# EAGLE board pnp-test (EAGLE 7.4.0)

Size 76 x 76 mm. Coordinates in mm from the lower left corner, seen from the top.
Outline: 0,0 0,76 76,76 76,0 0,0
Copper layers (1*16): Top 0.035mm / dielectric 1.5mm / Bottom 0.035mm
Design rules "default": minimum track width 10mil, minimum drill 24mil, track to track 8mil, track to pad 8mil, pad to pad 8mil, via to via 8mil, smd to smd 8mil, copper to edge 40mil, drill to drill 8mil, minimum pad ring 10mil, minimum via ring 8mil, stop-mask expansion 4mil, vias tented up to drill 0mil, thermal gap 10mil

## Footprints (pad centres in the part's own frame; a part is rotated, then mirrored left to right if it is on the bottom)
FIDUCIAL-1X2 = smd 1 x 1: 1 0,0
R0805 = smd 1.3 x 1.5: 1 -0.95,0; 2 0.95,0
R0201 = smd 0.28 x 0.43: 1 -0.255,0; 2 0.255,0
R0402 = smd 0.7 x 0.9: 1 -0.65,0; 2 0.65,0
R0603 = smd 1 x 1.1: 1 -0.85,0; 2 0.85,0

## Placement (x,y rotation side)
FID1  FIDUCIAL1X2  [FIDUCIAL-1X2]  2.5,2.5 0 top
FID2  FIDUCIAL1X2  [FIDUCIAL-1X2]  73.5,2.5 0 top
FID3  FIDUCIAL1X2  [FIDUCIAL-1X2]  73.5,73.5 0 top
FID4  FIDUCIAL1X2  [FIDUCIAL-1X2]  2.5,73.5 0 top
R1  1K  [R0805]  38,38 0 top
R2  1K  [R0805]  62,38 0 top
R3  1K  [R0805]  61.18,44.21 15 top
R4  1K  [R0805]  58.78,50 30 top
R5  1K  [R0805]  54.97,54.97 45 top
R6  1K  [R0805]  50,58.78 60 top
R7  1K  [R0805]  44.21,61.18 75 top
R8  1K  [R0805]  38,62 90 top
R9  1K  [R0805]  31.79,61.18 105 top
R10  1K  [R0805]  26,58.78 120 top
R11  1K  [R0805]  21.03,54.97 135 top
R12  1K  [R0805]  17.22,50 150 top
R13  1K  [R0805]  14.82,44.21 165 top
R14  1K  [R0805]  14,38 180 top
R15  1K  [R0805]  14.82,31.79 195 top
R16  1K  [R0805]  17.22,26 210 top
R17  1K  [R0805]  21.03,21.03 225 top
R18  1K  [R0805]  26,17.22 240 top
R19  1K  [R0805]  31.79,14.82 255 top
R20  1K  [R0805]  38,14 270 top
R21  1K  [R0805]  44.21,14.82 285 top
R22  1K  [R0805]  50,17.22 300 top
R23  1K  [R0805]  54.97,21.03 315 top
R24  1K  [R0805]  58.78,26 330 top
R25  1K  [R0805]  61.18,31.79 345 top
R36  1K  [R0201]  6,70 0 top
R37  1K  [R0201]  12,70 315 top
R38  1K  [R0201]  6,64 270 top
R39  1K  [R0402]  64,70 45 top
R40  1K  [R0402]  70,70 0 top
R41  1K  [R0402]  70,64 90 top
R42  1K  [R0603]  6,12 270 top
R43  1K  [R0603]  12,6 315 top
R44  1K  [R0603]  6,6 0 top

## Library data of the parts
FID1-FID4 = SparkFun
R1-R25 R36-R44 = rcl

## Text on the board
tNames: FID4 | FID3 | 0201 | 0402 | 0805 | 0603 | FID1 | FID2